# Altium PCB jacks.PcbDoc
Units mil, origin at the board's own origin, x right, y up, seen from the top; angles counter-clockwise.
Board outline 1299.21 x 1653.83 mil, 2 copper layers (Top Layer, Bottom Layer); 4 components, 0 nets, 40 pads, 0 vias.
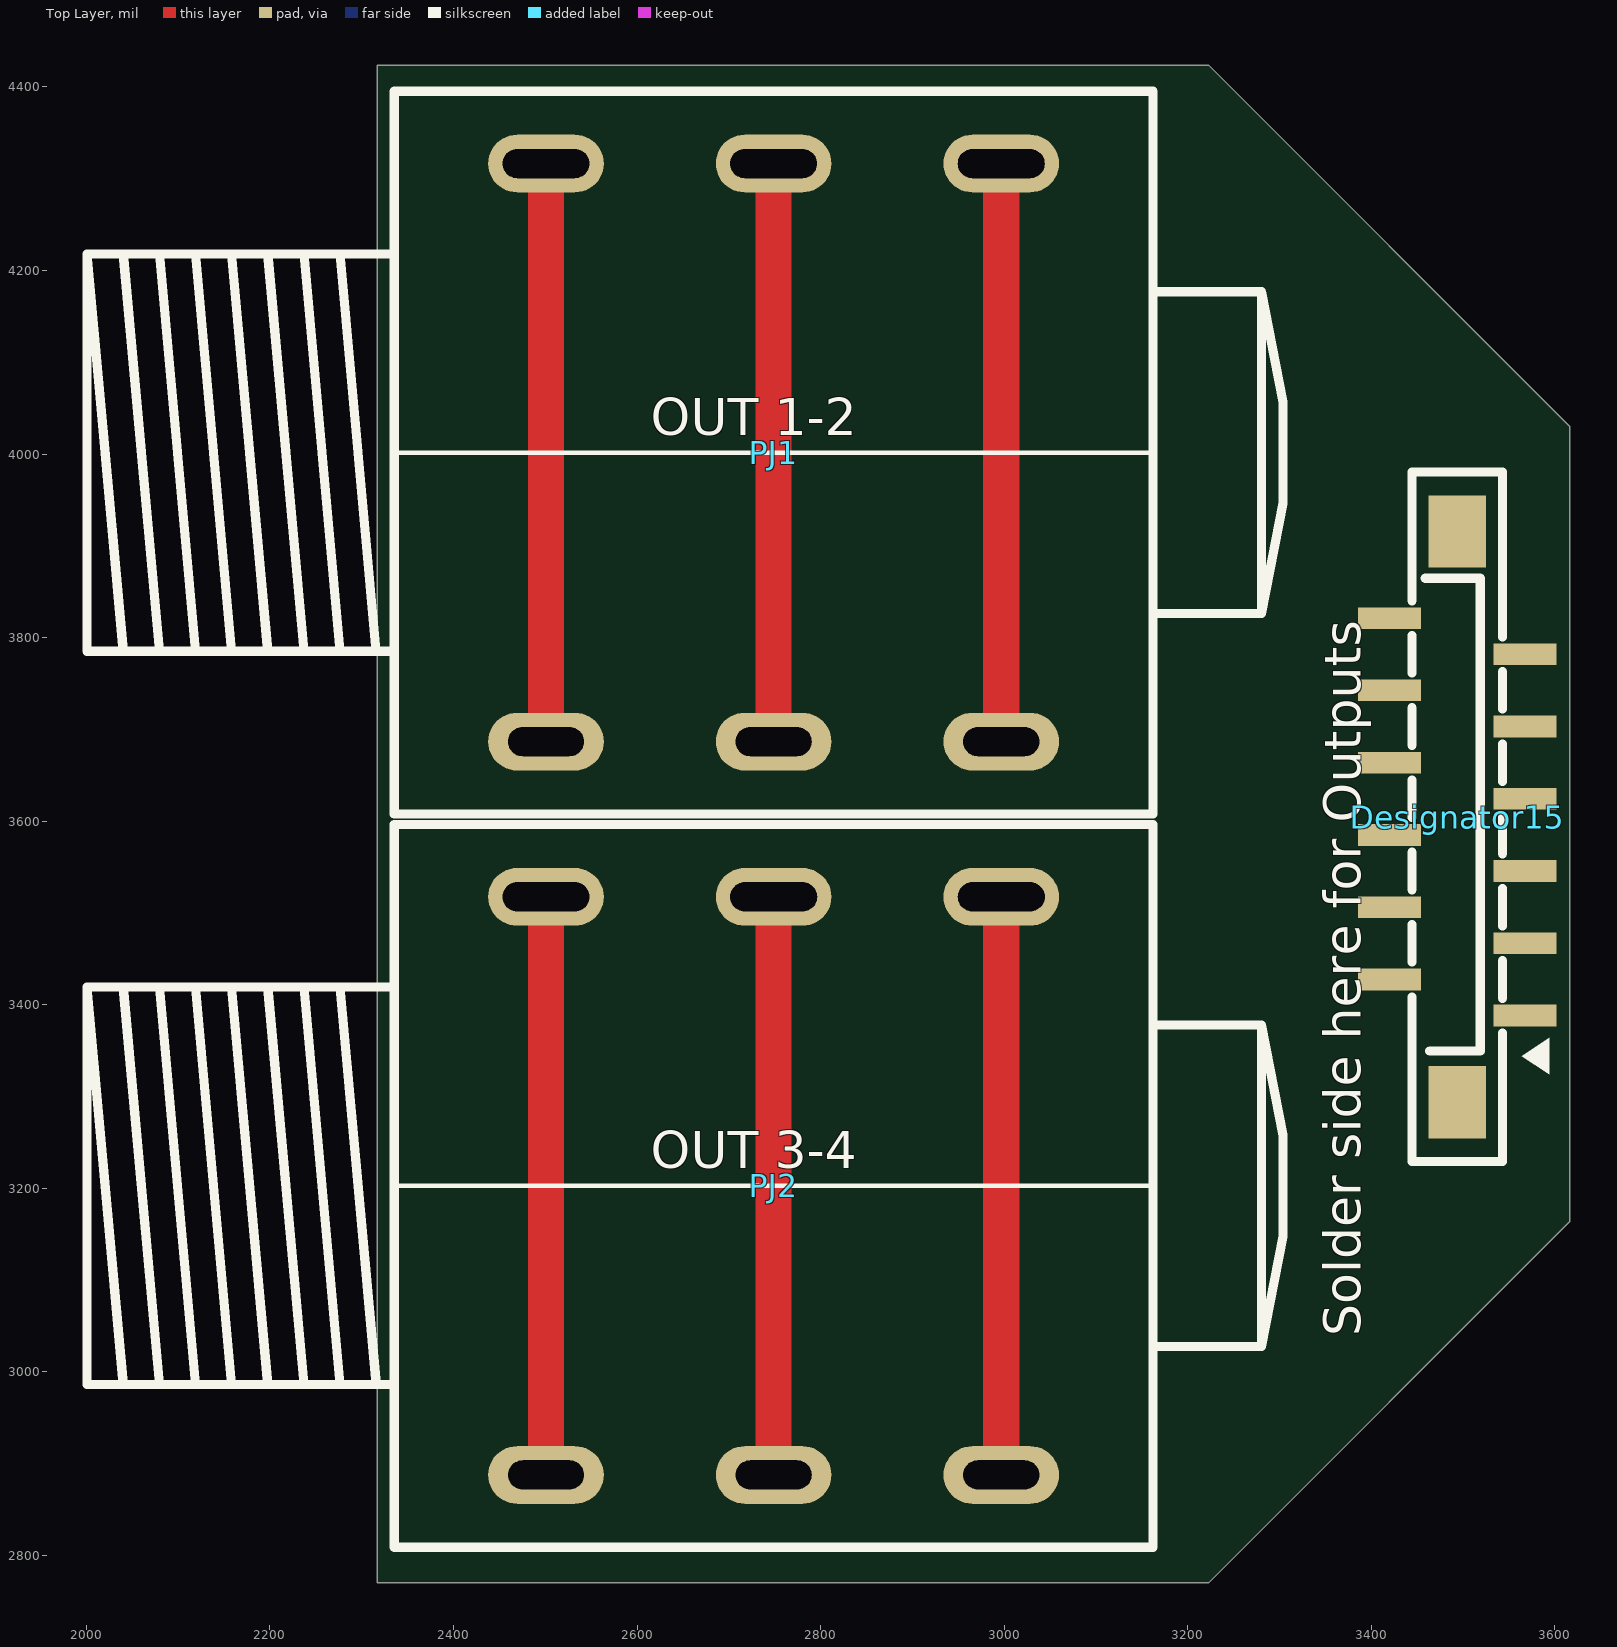
[diagram p0: Top Layer view]
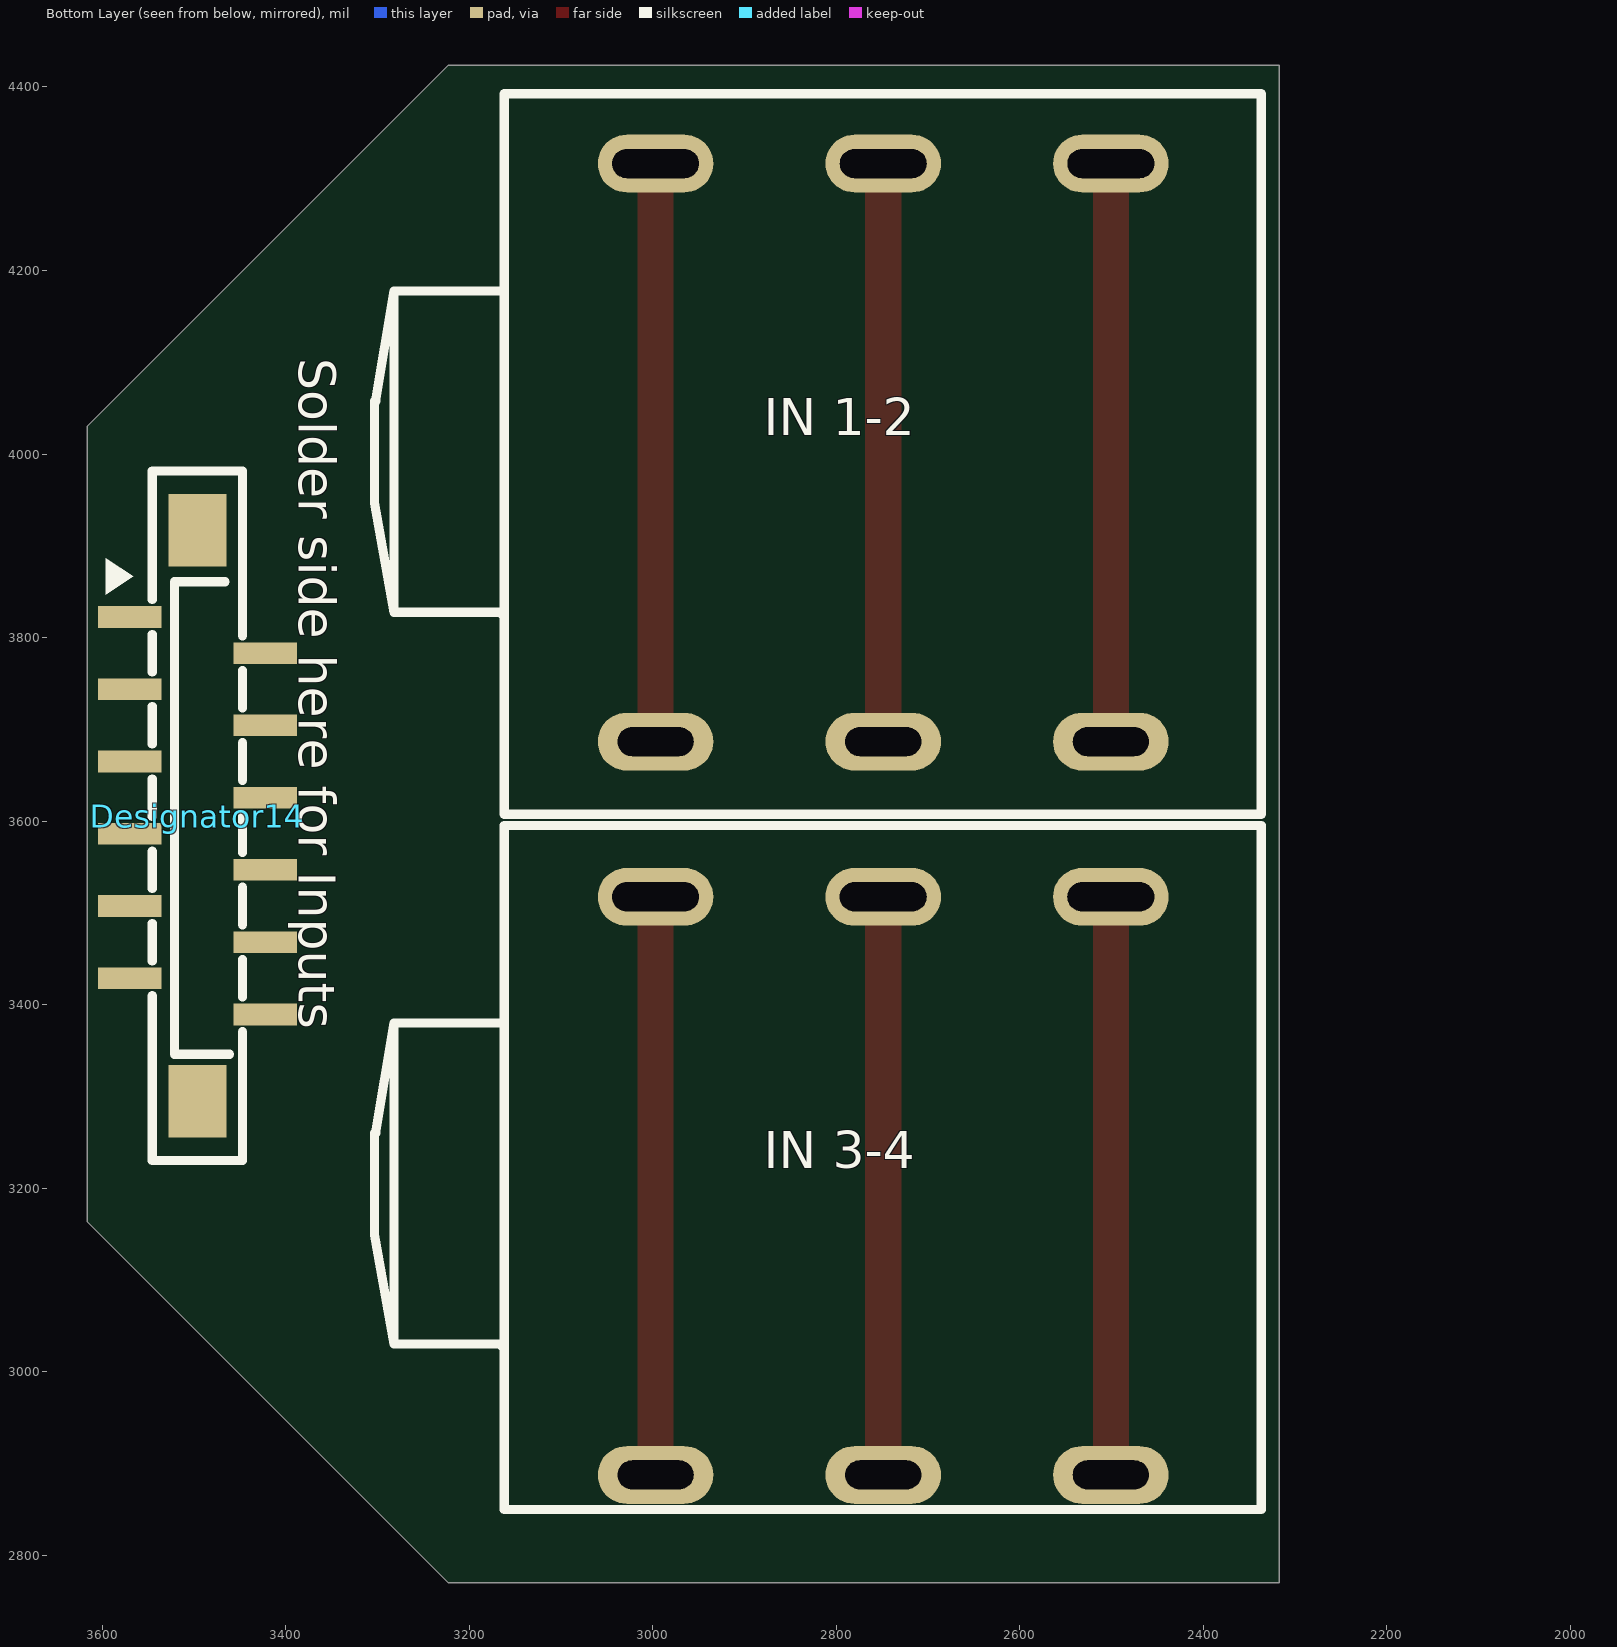
[diagram p1: Bottom Layer view, seen from below]

## Layer stack, top to bottom
Top Solder: solder mask 0.4, Solder Resist, Dk 3.5
Top Layer: signal copper 1.4
Dielectric 1: dielectric 12.6, FR-4, Dk 4.8
Bottom Layer: signal copper 1.4
Bottom Solder: solder mask 0.4, Solder Resist, Dk 3.5

## Board outline
2317.13,2770 2317.13,4423.83 3222.65,4423.83 3616.35,4030.13 3616.35,3163.7 3222.65,2770

## Design rules (kind name [scope] priority, off if disabled: settings)
Clearance [All] p1: gap=10 ignorepadtopadclearanceinfootprint=FALSE except(0: Arc-Hole Track-Hole SMDPad-Hole THPad-Hole Via-Hole Fill-Hole Poly-Hole Region-Hole Text-Hole)
PolygonConnect [All] p1: connectstyle=Relief reliefconductorwidth=10 reliefentries=4 polygonreliefangle="90 Angle" airgapwidth=10
RoutingVias [All] p1: holewidth=28 width=50 viastyle="Through Hole" minholewidth=28 minwidth=50 maxholewidth=28 maxwidth=50
SolderMaskExpansion [All] p1: expansion=4 istentingtop=FALSE
Width [All] p1: maxlimit=10 minlimit=10 preferedwidth=10
30 further rules are at their usual default settings.

## Components (designator, comment, footprint, x,y, rotation, side; value= is the part's Value field where it differs from the comment)
Designator14 "Comment" AFA11-S12GLA-00 3570,3822.48 r270 bottom
Designator15 "Comment" AFA11-S12GLA-00 3567.64,3388.15 r90 top
PJ1 "PJ-609AE" PJ609AE 2500.82,3686.64 r0 top
PJ2 "PJ-609AE" PJ609AE 2500.85,2887.64 r0 top

## Footprints (in the part's own frame and the unit in brackets; to place one, negate y for a bottom-side part, rotate by r counter-clockwise, add the part's x,y. Pads: shape width x height; smd on the part's side, far side on the other; paste and mask are expansions set on the pad)
AFA11-S12GLA-00 [mm]
  rect 0.6x1.75 smd paste+0 mask+0.05: 1(0,0) 2(1,3.75) 3(2,0) 4(3,3.75) 5(4,0) 6(5,3.75) 7(6,0) 8(7,3.75) 9(8,0) 10(9,3.75) 11(10,0) 12(11,3.75)
  rect 2x1.6 smd paste+0 mask+0.05: 13(13.4,1.875) 14(-2.4,1.875)
  silkscreen extent -4.04,-0.66 15.04,3.13, body extent -3.69,-0.35 14.71,4.16, height 5.35
PJ609AE [mm] "HOOYA"
  oval 3.2x1.6 hole 0.8 slot 2.1 at 0 deg paste+0 mask+0.051: 2(0,0) 4(6.3,0) 6(12.6,0)
  oval 3.2x1.6 hole 0.8 slot 2.4 at 0 deg paste+0 mask+0.051: 3(0,16) 5(6.3,16) 7(12.6,16)
  silkscreen extent -12.7,-2 20.4,18, body extent -12.16,-1.4 21.2,17.09, height 16.2

## Part data
PJ1 PJ2: "6.3mm jack HOOYA"

## Nets (pads, with @x,y where several pads share a name; then routed paths per layer and width w, separated by ;. In a path a pad name is that pad's centre, name@x,y a point inside that pad or via, vN(x,y) a via of type N, cw(c..) or ccw(c..) an arc to the next point about the centre after c; other vN are vias at no path point)
pads on no net: Designator14.1 Designator14.2 Designator14.3 Designator14.4 Designator14.5 Designator14.6 Designator14.7 Designator14.8 Designator14.9 Designator14.10 Designator14.11 Designator14.12 Designator14.13 Designator14.14 Designator15.1 Designator15.2 Designator15.3 Designator15.4 Designator15.5 Designator15.6 Designator15.7 Designator15.8 Designator15.9 Designator15.10 Designator15.11 Designator15.12 Designator15.13 Designator15.14 PJ1.2 PJ1.3 PJ1.4 PJ1.5 PJ1.6 PJ1.7 PJ2.2 PJ2.3 PJ2.4 PJ2.5 PJ2.6 PJ2.7
copper on no net: | length 3779.5
  Top Layer w39.37: 2500.82,3686.64 2500.82,4316.56 ; 2500.85,2887.64 2500.85,3517.56 ; 2748.85,3686.64 2748.85,4316.56 ; 2748.88,2887.64 2748.88,3517.56 ; 2996.91,2887.64 2996.91,3517.56 ; 2996.88,3686.64 2996.88,4316.56

## Silkscreen, mask and mechanical layers (free items; w line width, h text height)
Top Overlay:
  text "OUT 1-2" at 2614.88,4020.64 h40
  text "OUT 3-4" at 2614.91,3221.64 h40
  text "Solder side here for Outputs" at 3388.56,3038.64 h40 r90
Bottom Overlay:
  lines w10: 3161.88,3025.14 3166.88,3030.14 3281.88,3030.14 ; 3161.88,3380.14 3281.88,3380.14 ; 3161.88,3822.64 3166.88,3827.64 3281.88,3827.64 ; 3161.88,4177.64 3281.88,4177.64 ; 3281.88,3030.14 3303.09,3149.3 3303.37,3260.27 3301.88,3260.14 3281.88,3380.14 ; 3281.88,3030.14 3281.88,3380.14 ; 3281.88,3827.64 3281.88,4177.64 ; 3281.88,3827.64 3303.09,3946.8 3303.37,4057.77 3301.88,4057.64 3281.88,4177.64 ; 2336.88,2850 2336.88,3595.14 3161.88,3595.14 3161.88,2850 2336.88,2850 ; 2336.88,3607.64 3161.88,3607.64 3161.88,4392.64 2336.88,4392.64 2336.88,3607.64
  text "Solder side here for Inputs" at 3385.56,4104.64 h40 r90
  text "IN 1-2" at 2878.88,4020.64 h40
  text "IN 3-4" at 2878.91,3221.64 h40
Undefined:
  the board outline again, w0.5